# Altium PCB ESP32.PcbDoc
Units mm, origin at the board's own origin, x right, y up, seen from the top; angles counter-clockwise.
Board outline 52.07 x 118.11 mm, 2 copper layers (Top Layer, Bottom Layer); 13 components, 24 nets, 98 pads, 0 vias.
Unrouted connection lines stored in the file: 3.
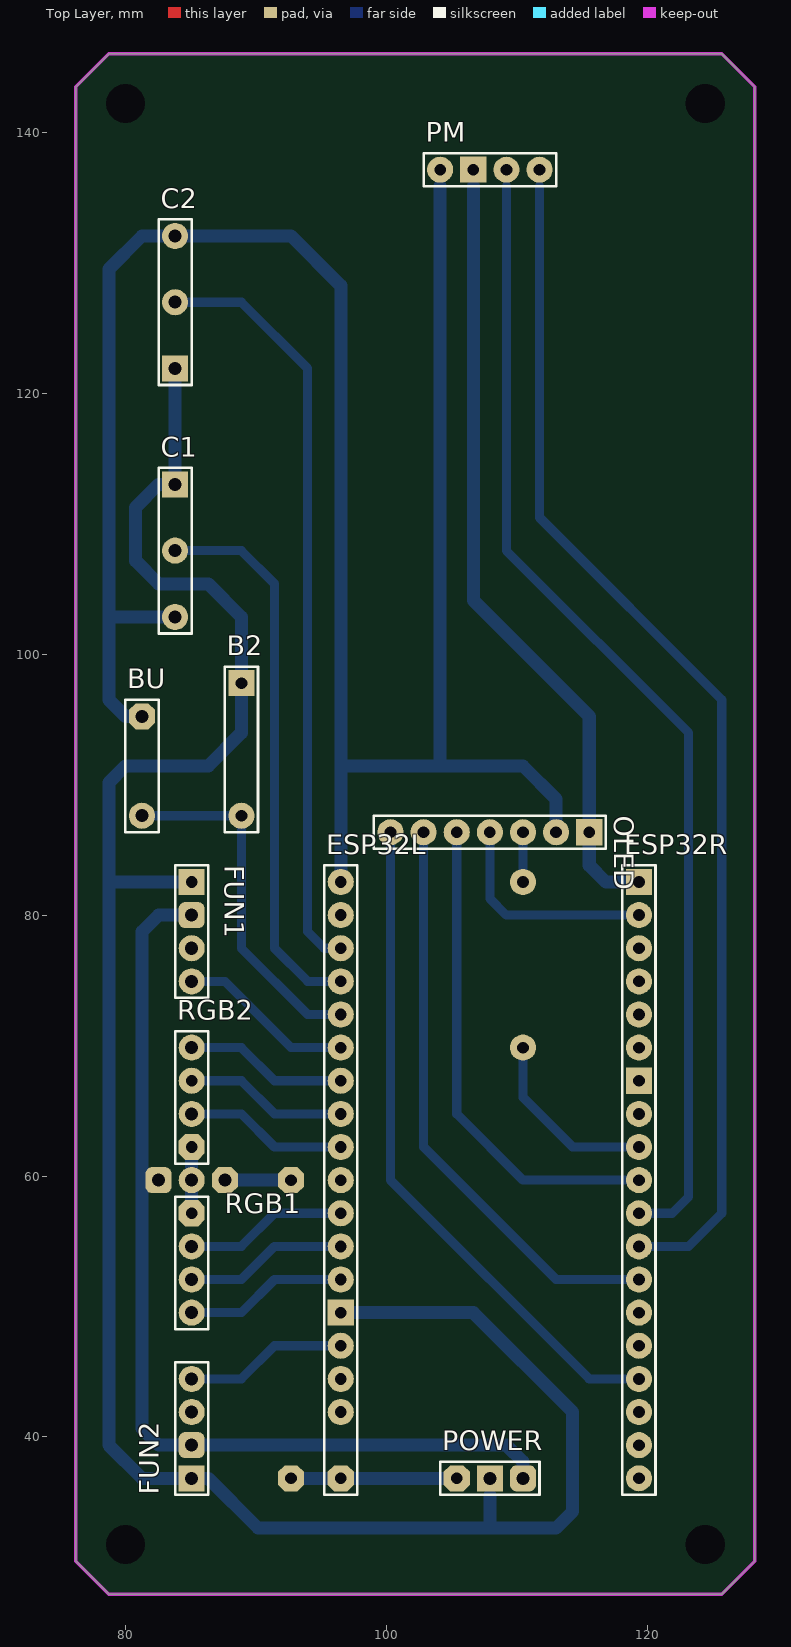
[diagram p0: Top Layer view]
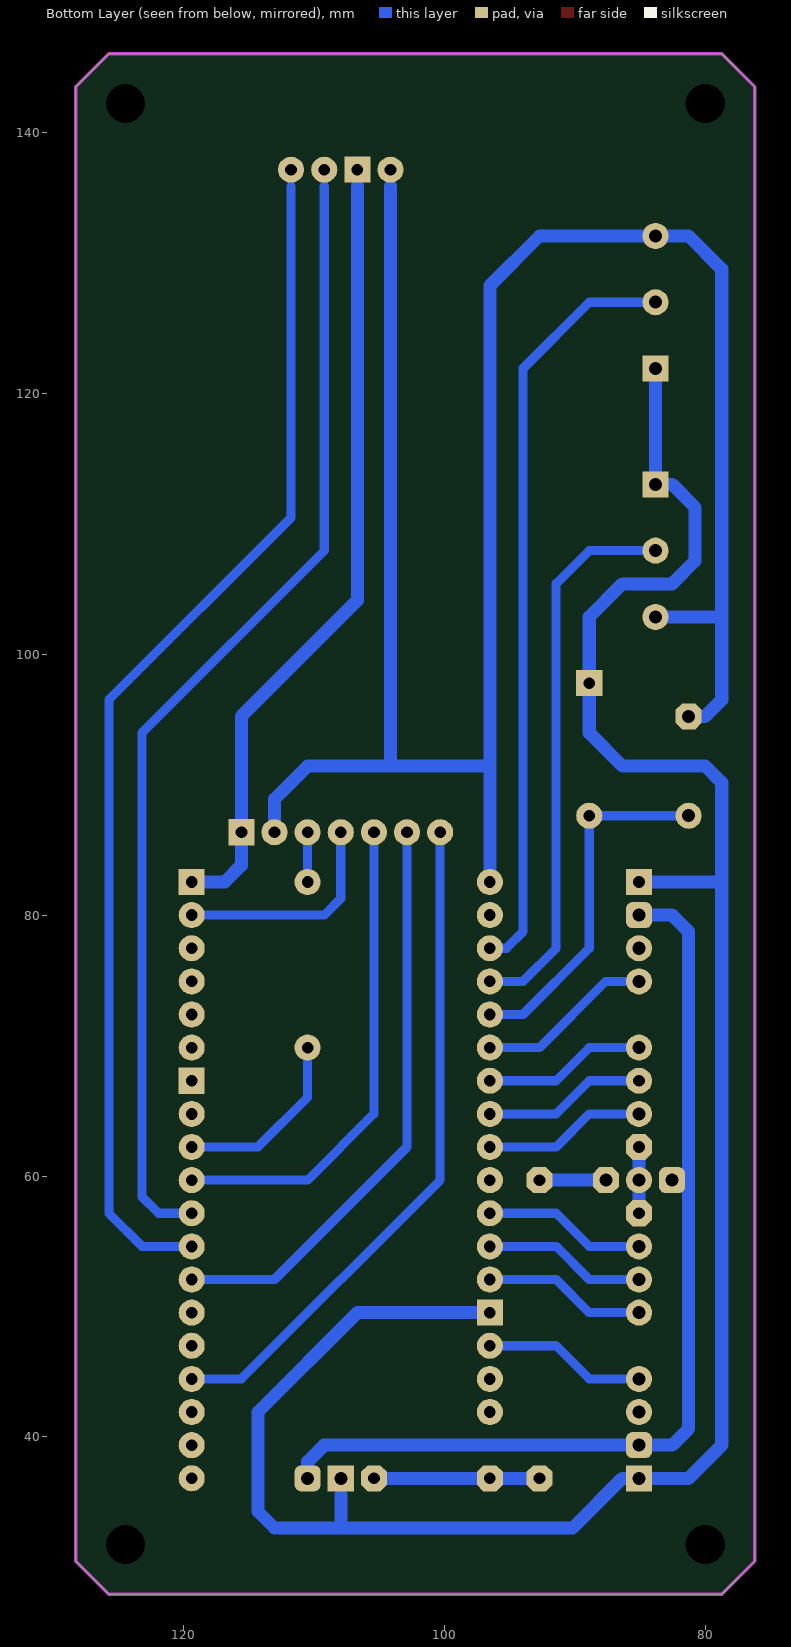
[diagram p1: Bottom Layer view, seen from below]

## Layer stack, top to bottom
Top Solder: solder mask 0.0102, Solder Resist, Dk 3.5
Top Layer: signal copper 0.0356
Dielectric 1: dielectric 0.32, FR-4, Dk 4.8
Bottom Layer: signal copper 0.0356
Bottom Solder: solder mask 0.0102, Solder Resist, Dk 3.5

## Board outline
76.2,30.48 78.74,27.94 125.73,27.94 128.27,30.48 128.27,143.51 125.73,146.05 78.74,146.05 76.2,143.51

## Design rules (kind name [scope] priority, off if disabled: settings)
Clearance [All] p1: gap=0.254 ignorepadtopadclearanceinfootprint=FALSE except(0: Arc-Hole Track-Hole SMDPad-Hole THPad-Hole Via-Hole Fill-Hole Poly-Hole Region-Hole Text-Hole)
PolygonConnect [All] p1: connectstyle=Relief reliefconductorwidth=0.254 reliefentries=4 polygonreliefangle="90 Angle" airgapwidth=0.254
RoutingVias [All] p1: holewidth=0.711 width=1.27 viastyle="Through Hole" minholewidth=0.711 minwidth=1.27 maxholewidth=0.711 maxwidth=1.27
SolderMaskExpansion [All] p1: expansion=0.102
Width VCCGND [InNet('3.3V','5V','12V','GND','GND1','GND2')] p1: maxlimit=2 minlimit=0.5 preferedwidth=1
Width [All] p2: maxlimit=2 minlimit=0.254 preferedwidth=0.7
30 further rules are at their usual default settings.

## Components (designator, comment, footprint, x,y, rotation, side; value= is the part's Value field where it differs from the comment)
B2 "Header 5" HDR1X5#1 88.9,97.79 r270 top
BU "Header 4" HDR1X4#1 81.28,87.63 r90 top
C1 "Header 5" HDR1X5#2 83.82,102.87 r90 top
C2 "Header 5" HDR1X5#2 83.82,132.08 r270 top
ESP32L "Header 19" HDR1X19#1 96.52,82.55 r270 top
ESP32R "Header 19" HDR1X19#2 119.38,82.55 r270 top
FUN1 "Header 4" HDR1X4#2 85.09,82.55 r270 top
FUN2 "Header 4" HDR1X4#3 85.09,36.83 r90 top
OLED "Header 7" HDR1X7 115.57,86.36 r180 top
PM "Header 4" HDR1X4#4 104.14,137.16 r0 top
POWER "Header 3" HDR1X3 110.49,36.83 r180 top
RGB1 "Header 4" HDR1X4#5 85.09,57.15 r270 top
RGB2 "Header 4" HDR1X4#6 85.09,69.85 r270 top

## Footprints (in the part's own frame and the unit in brackets; to place one, negate y for a bottom-side part, rotate by r counter-clockwise, add the part's x,y. Pads: shape width x height; smd on the part's side, far side on the other; paste and mask are expansions set on the pad)
HDR1X3 [mm] "Connector; Header; 3 Position"
  rrect50% 2x2 hole 1: 1(0,0)
  rect 2x2 hole 1: 2(2.54,0)
  oct 2x2 hole 0.9: 3(5.08,0)
  silkscreen extent -1.27,-1.27 6.35,1.27
HDR1X4#1 [mm] "Connector; Header; 4 Position"
  round 2 hole 1: 1(0,0)
  round 0 all layers, no hole: 2(2.54,0) 3(5.08,0)
  oct 2x2 hole 1: 4(7.62,0)
  silkscreen extent -1.27,-1.27 8.89,1.27
HDR1X4#2 [mm] "Connector; Header; 4 Position"
  rect 2x2 hole 0.9: 1(0,0)
  rrect50% 2x2 hole 1: 2(2.54,0)
  round 2 hole 1: 3(5.08,0) 4(7.62,0)
  silkscreen extent -1.27,-1.27 8.89,1.27
HDR1X4#3 [mm] "Connector; Header; 4 Position"
  rect 2x2 hole 1: 1(0,0)
  rrect50% 2x2 hole 1: 2(2.54,0)
  round 2 hole 1: 3(5.08,0) 4(7.62,0)
  silkscreen extent -1.27,-1.27 8.89,1.27
HDR1X4#4 [mm] "Connector; Header; 4 Position"
  round 2 hole 0.9: 1(0,0) 3(5.08,0) 4(7.62,0)
  rect 2x2 hole 0.9: 2(2.54,0)
  silkscreen extent -1.27,-1.27 8.89,1.27
HDR1X4#5 [mm] "Connector; Header; 4 Position"
  oct 2x2 hole 0.9: 1(0,0)
  round 2 hole 1: 2(2.54,0) 3(5.08,0) 4(7.62,0)
  silkscreen extent -1.27,-1.27 8.89,1.27
HDR1X4#6 [mm] "Connector; Header; 4 Position"
  round 2 hole 1: 1(0,0) 3(5.08,0)
  round 2 hole 0.9: 2(2.54,0)
  oct 2x2 hole 0.9: 4(7.62,0)
  silkscreen extent -1.27,-1.27 8.89,1.27
HDR1X5#1 [mm] "Connector; Header; 5 Position"
  rect 2x2 hole 0.9: 1(0,0)
  round 0 all layers, no hole: 2(2.54,0) 3(5.08,0) 4(7.62,0)
  round 2 hole 0.9: 5(10.16,0)
  silkscreen extent -1.27,-1.27 11.43,1.27
HDR1X5#2 [mm] "Connector; Header; 5 Position"
  round 2 hole 1: 1(0,0) 3(5.08,0)
  round 0 all layers, no hole: 2(2.54,0) 4(7.62,0)
  rect 2x2 hole 1: 5(10.16,0)
  silkscreen extent -1.27,-1.27 11.43,1.27
HDR1X7 [mm] "Connector; Header; 7 Position"
  rect 2x2 hole 0.9: 1(0,0)
  round 2 hole 0.9: 2(2.54,0) 3(5.08,0) 4(7.62,0) 5(10.16,0) 6(12.7,0) 7(15.24,0)
  silkscreen extent -1.27,-1.27 16.51,1.27
HDR1X19#1 [mm] "Connector; Header; 19 Position"
  round 2 hole 0.9: 1(0,0) 2(2.54,0) 3(5.08,0) 4(7.62,0) 5(10.16,0) 6(12.7,0) 7(15.24,0) 8(17.78,0) 9(20.32,0) 10(22.86,0) 11(25.4,0) 12(27.94,0) 13(30.48,0) 15(35.56,0) 16(38.1,0) 17(40.64,0)
  rect 2x2 hole 0.9: 14(33.02,0)
  round 0 all layers, no hole: 18(43.18,0)
  oct 2x2 hole 0.9: 19(45.72,0)
  silkscreen extent -1.27,-1.27 46.99,1.27
HDR1X19#2 [mm] "Connector; Header; 19 Position"
  rect 2x2 hole 0.9: 1(0,0) 7(15.24,0)
  round 2 hole 0.9: 2(2.54,0) 3(5.08,0) 4(7.62,0) 5(10.16,0) 6(12.7,0) 8(17.78,0) 9(20.32,0) 10(22.86,0) 11(25.4,0) 12(27.94,0) 13(30.48,0) 14(33.02,0) 15(35.56,0) 16(38.1,0) 17(40.64,0) 18(43.18,0) 19(45.72,0)
  silkscreen extent -1.27,-1.27 46.99,1.27

## Part data
B2 C1 C2: "Header, 5-Pin", LatestRevisionDate=17-Jul-2002, LatestRevisionNote="Re-released for DXP Platform.", Publisher="Altium Limited"
BU FUN1 FUN2 PM RGB1 RGB2: "Header, 4-Pin", LatestRevisionDate=17-Jul-2002, LatestRevisionNote="Re-released for DXP Platform.", Publisher="Altium Limited"
ESP32L ESP32R: "Header, 19-Pin", LatestRevisionDate=17-Jul-2002, LatestRevisionNote="Re-released for DXP Platform.", Publisher="Altium Limited"
OLED: "Header, 7-Pin", LatestRevisionDate=17-Jul-2002, LatestRevisionNote="Re-released for DXP Platform.", Publisher="Altium Limited"
POWER: "Header, 3-Pin", LatestRevisionDate=17-Jul-2002, LatestRevisionNote="Re-released for DXP Platform.", Publisher="Altium Limited"

## Free pads (board coordinates)
  round 2 hole 0.9: 18(110.49,82.55) 19(110.49,69.85)
  round 0 hole 3: 26(80.01,31.75) 27(124.46,31.75) 28(80.01,142.24) 29(124.46,142.24)
  oct 2x2 hole 0.9: 51(92.71,59.69) 55(92.71,36.83)
  round 2 hole 1: 56(85.09,59.69)
  oct 2x2 hole 1: 57(87.63,59.69)
  rrect50% 2x2 hole 1: 58(82.55,59.69)

## Nets (pads, with @x,y where several pads share a name; then routed paths per layer and width w, separated by ;. In a path a pad name is that pad's centre, name@x,y a point inside that pad or via, vN(x,y) a via of type N, cw(c..) or ccw(c..) an arc to the next point about the centre after c; other vN are vias at no path point)
3.3V: BU.4 C1.1 C2.1 ESP32L.1 OLED.2 PM.1 | length 171.8
  Bottom Layer w1: BU.4 80.01,95.25 78.74,96.52 78.74,102.87 ; C1.1 78.74,102.87 ; ESP32L.1 96.52,91.44 ; 104.14,135.89 104.14,91.44 ; OLED.2 113.03,88.9 110.49,91.44 104.14,91.44 ; 78.74,102.87 78.74,129.54 81.28,132.08 C2.1 92.71,132.08 96.52,128.27 96.52,91.44 ; 96.52,91.44 104.14,91.44
5V: ESP32L.19 pad.51 pad.55 pad.56 pad.57 POWER.3 RGB1.1 RGB2.4 | length 22.9
  Bottom Layer w1: RGB1.1 pad.56 RGB2.4 ; pad.57 pad.51 ; pad.55 ESP32L.19 POWER.3
12V: FUN1.2 FUN2.2 pad.58 POWER.1 | length 75.2
  Bottom Layer w1: pad.58 81.28,59.69 ; FUN1.2 82.55,80.01 81.28,78.74 81.28,59.69 ; POWER.1 110.49,38.1 109.22,39.37 FUN2.2 82.55,39.37 81.28,40.64 81.28,59.69
GND: ESP32R.7
GND1: ESP32R.1 OLED.1 PM.2 | length 60.1
  Bottom Layer w1: 106.68,135.89 106.68,104.14 115.57,95.25 OLED.1 115.57,83.82 116.84,82.55 ESP32R.1
GND2: B2.1 C1.5 C2.5 ESP32L.14 FUN1.1 FUN2.1 POWER.2 | length 174.2
  Bottom Layer w1: C2.5 C1.5 82.55,113.03 80.796,111.276 80.796,107.164 82.55,105.41 86.36,105.41 88.9,102.87 B2.1 88.9,93.98 86.36,91.44 80.01,91.44 78.74,90.17 78.74,82.55 ; FUN1.1 78.74,82.55 ; ESP32L.14 106.68,49.53 114.3,41.91 114.3,34.29 113.03,33.02 107.95,33.02 ; 107.95,35.56 107.95,33.02 ; 78.74,82.55 78.74,39.37 81.28,36.83 FUN2.1 86.36,36.83 90.17,33.02 107.95,33.02
NetB2_5: B2.5 BU.1 ESP32L.5 | length 27.5
  Bottom Layer w0.7: BU.1 B2.5 88.9,77.47 93.98,72.39 ESP32L.5
NetC1_3: C1.3 ESP32L.4 | length 42.7
  Bottom Layer w0.7: C1.3 88.9,107.95 91.44,105.41 91.44,77.47 93.98,74.93 ESP32L.4
NetC2_3: C2.3 ESP32L.3 | length 58.5
  Bottom Layer w0.7: C2.3 88.9,127 93.98,121.92 93.98,78.74 95.25,77.47 ESP32L.3
NetESP32L_6: ESP32L.6 FUN1.4 | length 13.5
  Bottom Layer w0.7: FUN1.4 87.63,74.93 92.71,69.85 ESP32L.6
NetESP32L_7: ESP32L.7 RGB2.1 | length 12.6
  Bottom Layer w0.7: RGB2.1 88.9,69.85 91.44,67.31 ESP32L.7 ESP32L.7@96.52,67.389
NetESP32L_8: ESP32L.8 RGB2.2 | length 12.5
  Bottom Layer w0.7: RGB2.2 88.9,67.31 91.44,64.77 ESP32L.8
NetESP32L_9: ESP32L.9 RGB2.3 | length 12.5
  Bottom Layer w0.7: RGB2.3 88.9,64.77 91.44,62.23 ESP32L.9
NetESP32L_11: ESP32L.11 RGB1.2 | length 12.5
  Bottom Layer w0.7: RGB1.2 88.9,54.61 91.44,57.15 ESP32L.11
NetESP32L_12: ESP32L.12 RGB1.3 | length 12.5
  Bottom Layer w0.7: RGB1.3 88.9,52.07 91.44,54.61 ESP32L.12
NetESP32L_13: ESP32L.13 RGB1.4 | length 12.5
  Bottom Layer w0.7: RGB1.4 88.9,49.53 91.44,52.07 ESP32L.13
NetESP32L_15: ESP32L.15 FUN2.4 | length 12.5
  Bottom Layer w0.7: FUN2.4 88.9,44.45 91.44,46.99 ESP32L.15
NetESP32R_2: ESP32R.2 OLED.4 | length 17
  Bottom Layer w0.7: OLED.4 107.95,81.28 109.22,80.01 ESP32R.2
NetESP32R_9: ESP32R.9 OLED.3 pad.18 pad.19 | length 18.1
  Bottom Layer w0.7: pad.19 110.49,66.04 114.3,62.23 ESP32R.9 ; pad.18 OLED.3
NetESP32R_10: ESP32R.10 OLED.5 | length 37.7
  Bottom Layer w0.7: OLED.5 105.41,64.77 110.49,59.69 ESP32R.10
NetESP32R_11: ESP32R.11 PM.3 | length 87.6
  Bottom Layer w0.7: 109.22,135.89 109.22,107.95 123.19,93.98 123.19,58.42 121.92,57.15 ESP32R.11
NetESP32R_12: ESP32R.12 PM.4 | length 91.9
  Bottom Layer w0.7: 111.76,135.89 111.76,110.49 125.73,96.52 125.73,57.15 123.19,54.61 ESP32R.12
NetESP32R_13: ESP32R.13 OLED.6 | length 44.8
  Bottom Layer w0.7: OLED.6 102.87,62.23 113.03,52.07 ESP32R.13
NetESP32R_16: ESP32R.16 OLED.7 | length 52
  Bottom Layer w0.7: OLED.7 100.33,59.69 115.57,44.45 ESP32R.16
pads on no net: B2.2 B2.3 B2.4 BU.2 BU.3 C1.2 C1.4 C2.2 C2.4 ESP32L.2 ESP32L.10 ESP32L.16 ESP32L.17 ESP32L.18 ESP32R.3 ESP32R.4 ESP32R.5 ESP32R.6 ESP32R.8 ESP32R.14 ESP32R.15 ESP32R.17 ESP32R.18 ESP32R.19 FUN1.3 FUN2.3

## Keep-outs
Keep-Out Layer:
  the board outline again, w0.254